# EAGLE board untitled (EAGLE 4.11)
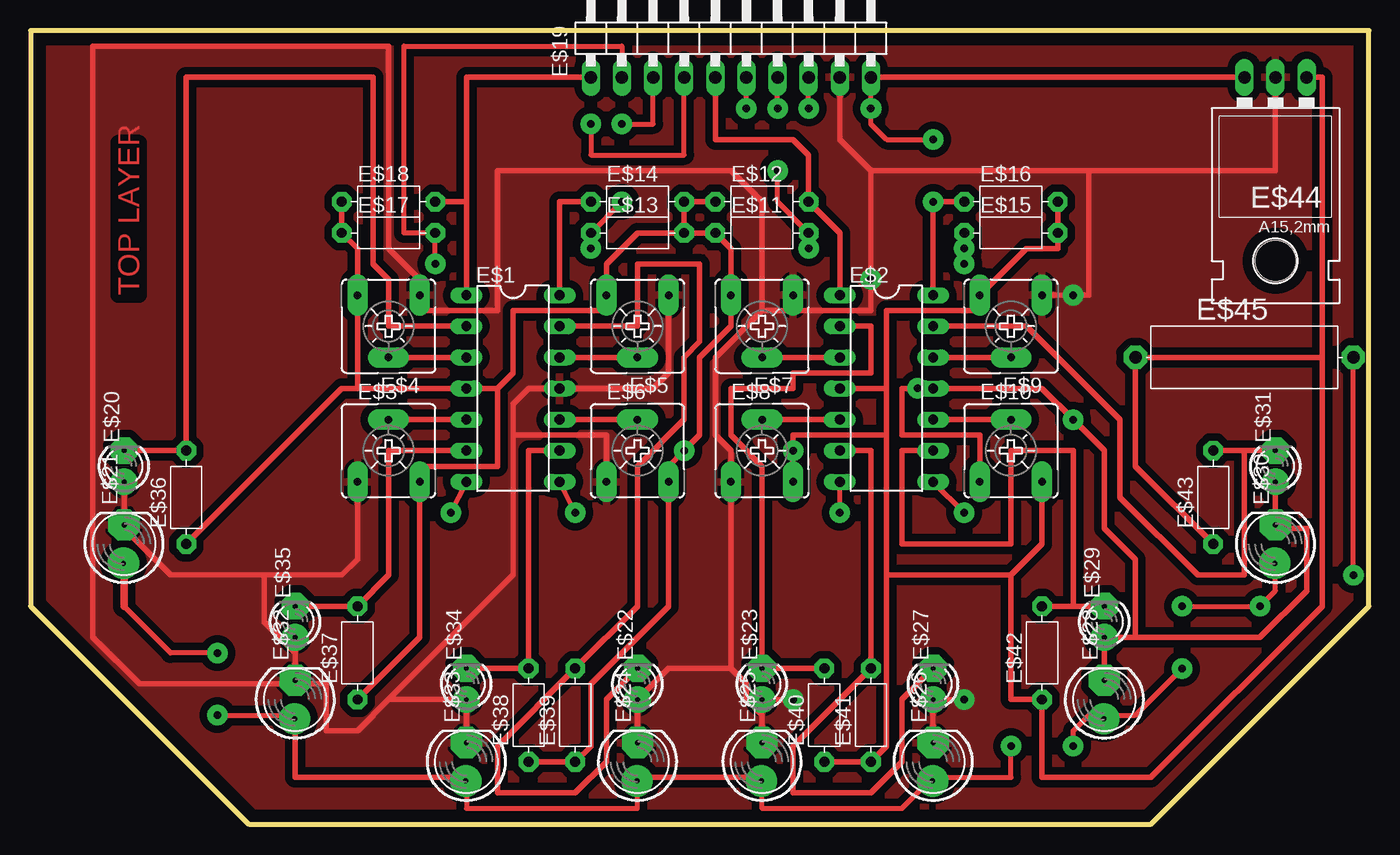
[diagram p0: board, top side]
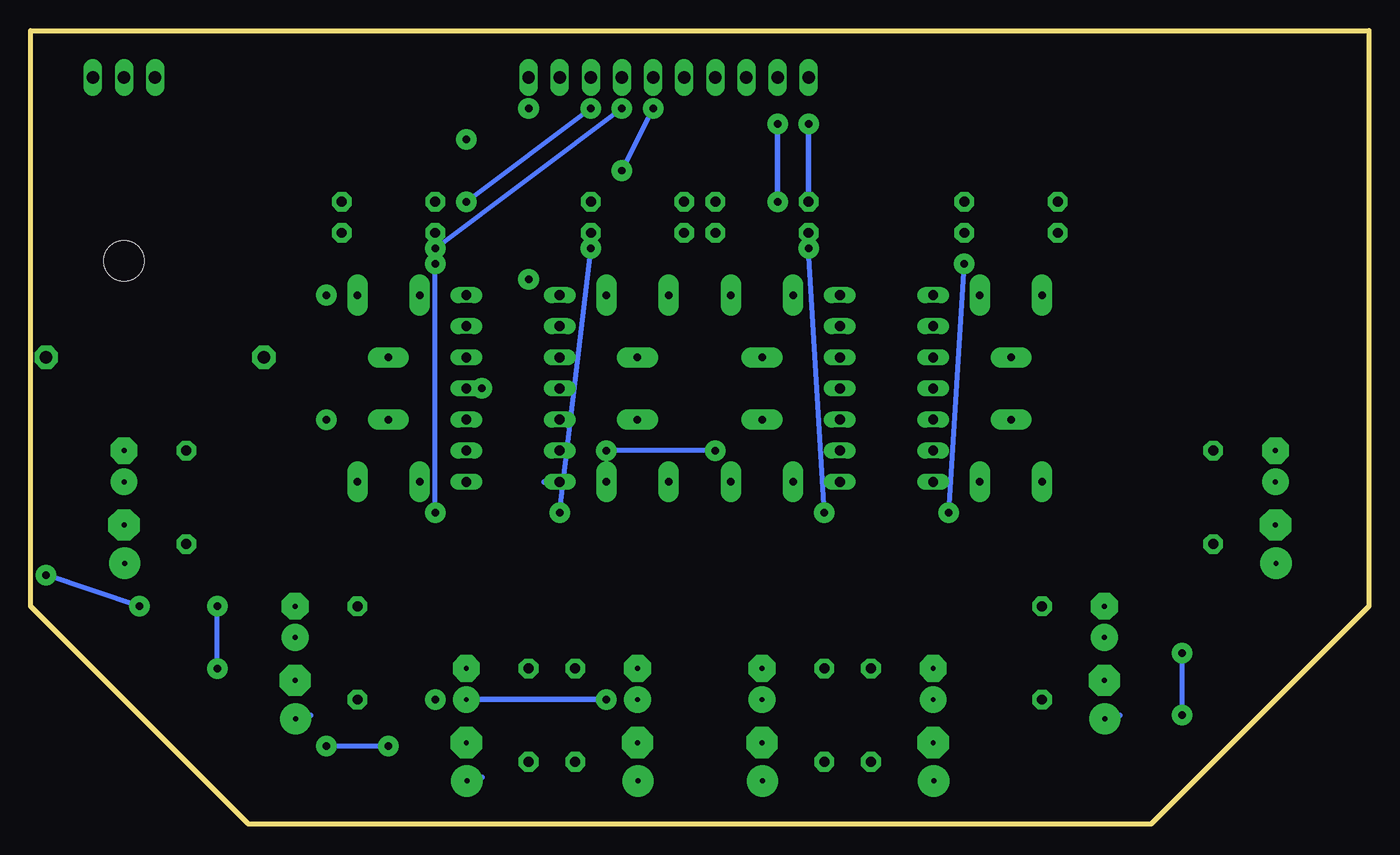
[diagram p1: board, bottom side, seen from below]

Size 109.22 x 64.77 mm. Coordinates in mm from the lower left corner, seen from the top.
Outline: 17.78,0 91.44,0 109.22,17.78 109.22,64.77 0,64.77 0,17.78 17.78,0
Copper layers (1*16): Top 0.035mm / dielectric 1.5mm / Bottom 0.035mm
Design rules "default": minimum track width 18mil, minimum drill 24mil, track to track 15mil, track to pad 15mil, pad to pad 15mil, via to via 15mil, smd to smd 8mil, copper to edge 40mil, drill to drill 8mil, minimum pad ring 10mil, minimum via ring 8mil, stop-mask expansion 4mil, vias tented up to drill 0mil, thermal gap 10mil

## Footprints (pad centres in the part's own frame; a part is rotated, then mirrored left to right if it is on the bottom)
DIL14 = drill 0.813 long: 1 -7.62,-3.81; 2 -5.08,-3.81; 3 -2.54,-3.81; 4 0,-3.81; 5 2.54,-3.81; 6 5.08,-3.81; 7 7.62,-3.81; 8 7.62,3.81; 9 5.08,3.81; 10 2.54,3.81; 11 0,3.81; 12 -2.54,3.81; 13 -5.08,3.81; 14 -7.62,3.81
CA6V = drill 0.61 pad 1.676 long: A -2.54,-2.54; E 2.54,-2.54; S 0,2.54
R-7,5 = drill 0.813 pad 1.6 octagon: 1 -3.81,0; 2 3.81,0
1X10/90 = drill 1.016 long: 1 -11.43,-3.81; 2 -8.89,-3.81; 3 -6.35,-3.81; 4 -3.81,-3.81; 5 -1.27,-3.81; 6 1.27,-3.81; 7 3.81,-3.81; 8 6.35,-3.81; 9 8.89,-3.81; 10 11.43,-3.81
LED3MM = drill 0.406 pad 2.184 round: A -1.27,0 | drill 0.406 pad 2.184 octagon: K 1.27,0
LED5MM = drill 0.406 pad 2.54 round: A -1.568,0.044 | drill 0.406 pad 2.54 octagon: K 1.568,0
78XXL = drill 1.016 long: GND 0,-3.81; IN -2.54,-3.81; OUT 2.54,-3.81 | hole 3.302: 0,11.176
R-18 = drill 1.016 pad 1.905 octagon: 1 -8.89,0; 2 8.89,0

## Placement (x,y rotation side)
E$1  [DIL14]  39.37,35.56 270 top
E$2  [DIL14]  69.85,35.56 270 top
E$3  [CA6V]  29.21,30.48 0 top
E$4  [CA6V]  29.21,40.64 180 top
E$5  [CA6V]  49.53,40.64 180 top
E$6  [CA6V]  49.53,30.48 0 top
E$7  [CA6V]  59.69,40.64 180 top
E$8  [CA6V]  59.69,30.48 0 top
E$9  [CA6V]  80.01,40.64 180 top
E$10  [CA6V]  80.01,30.48 0 top
E$11  [R-7,5]  59.69,48.26 0 top
E$12  [R-7,5]  59.69,50.8 0 top
E$13  [R-7,5]  49.53,48.26 0 top
E$14  [R-7,5]  49.53,50.8 0 top
E$15  [R-7,5]  80.01,48.26 0 top
E$16  [R-7,5]  80.01,50.8 0 top
E$17  [R-7,5]  29.21,48.26 0 top
E$18  [R-7,5]  29.21,50.8 0 top
E$19  [1X10/90]  57.15,64.77 0 top
E$20  [LED3MM]  7.62,29.21 90 top
E$21  [LED5MM]  7.62,22.86 90 top
E$22  [LED3MM]  49.53,11.43 90 top
E$23  [LED3MM]  59.69,11.43 90 top
E$24  [LED5MM]  49.53,5.08 90 top
E$25  [LED5MM]  59.69,5.08 90 top
E$26  [LED5MM]  73.66,5.08 90 top
E$27  [LED3MM]  73.66,11.43 90 top
E$28  [LED5MM]  87.63,10.16 90 top
E$29  [LED3MM]  87.63,16.51 90 top
E$30  [LED5MM]  101.6,22.86 90 top
E$31  [LED3MM]  101.6,29.21 90 top
E$32  [LED5MM]  21.59,10.16 90 top
E$33  [LED5MM]  35.56,5.08 90 top
E$34  [LED3MM]  35.56,11.43 90 top
E$35  [LED3MM]  21.59,16.51 90 top
E$36  [R-7,5]  12.7,26.67 90 top
E$37  [R-7,5]  26.67,13.97 90 top
E$38  [R-7,5]  40.64,8.89 90 top
E$39  [R-7,5]  44.45,8.89 90 top
E$40  [R-7,5]  64.77,8.89 90 top
E$41  [R-7,5]  68.58,8.89 90 top
E$42  [R-7,5]  82.55,13.97 90 top
E$43  [R-7,5]  96.52,26.67 90 top
E$44  [78XXL]  101.6,57.15 180 top
E$45  [R-18]  99.06,38.1 0 top

## Library data of the parts
E$1 E$2 = ic-package
E$3-E$10 = pot
E$11-E$18 E$36-E$43 E$45 = discrete
E$19 = pinhead
E$20-E$35 = led
E$44 = v-reg

## Nets
S$1: E$1.2 E$20.K E$36.2
S$2: E$2.6 E$27.K E$41.2
S$3: E$1.8 E$13.1 E$19.3
S$4: E$2.7 E$11.2 E$19.6
S$5: E$1.9 E$34.K E$38.2
S$6: E$1.3 E$4.S
S$7: E$1.5 E$3.S
S$8: E$1.6 E$35.K E$37.2
S$9: E$2.11 E$10.A E$28.K E$29.A E$30.K E$31.A
S$10: E$1.14 E$14.1 E$19.4
S$11: E$1.12 E$5.S
S$12: E$1.10 E$6.S
S$13: E$1.13 E$22.K E$39.2
S$14: E$24.A E$25.A E$32.A E$33.A
S$15: E$19.10 E$44.OUT
S$16: E$2.2 E$23.K E$40.2
S$18: E$2.3 E$7.S
S$19: E$2.8 E$15.1 E$19.7
S$20: E$45.2
S$21: E$2.12 E$9.S
S$22: E$2.10 E$10.S
S$23: E$2.9 E$29.K E$42.2
S$24: E$2.13 E$31.K E$43.2
S$25: E$26.A
S$26: E$28.A
S$29: E$1.4 E$2.4 E$3.E E$4.E E$5.E E$6.E E$7.E E$8.E E$9.E E$10.E E$11.1 E$12.1 E$13.2 E$14.2 E$15.2 E$16.2 E$17.1 E$18.1 E$36.1 E$37.1 E$38.1 E$39.1 E$40.1 E$41.1 E$42.1 E$43.1 E$44.IN E$45.1
S$32: E$2.14 E$16.1 E$19.8
S$35: E$1.1 E$18.2 E$19.1
S$40: E$1.11 E$3.A E$4.A E$5.A E$6.A E$7.A E$8.A E$9.A E$19.9 E$20.A E$21.K E$22.A E$23.A E$24.K E$25.K E$26.K E$27.A E$32.K E$33.K E$34.A E$35.A E$44.GND
S$44: E$2.1 E$12.2 E$19.5
S$46: E$2.5 E$8.S
S$56: E$1.7 E$17.2 E$19.2

## Tracks (layer width: path | path; a pad name or v marks a point on that pad's centre or on a via)
S$1
  Top 0.457: E$1.2 29.21,40.64 29.21,44.45 27.94,45.72 27.94,60.96 12.7,60.96 E$36.2 E$20.K
S$2
  Top 0.457: E$2.6 68.58,30.48 E$41.2 62.23,6.35 62.23,2.54 68.58,2.54 71.12,5.08 71.12,10.16 E$27.K
S$3  (via drill 0.61 pad 1.68)
  Top 0.406: v44.45,25.4 E$1.8 | E$19.3 50.8,57.15 v48.26,57.15 | v48.26,50.8 E$13.1 v45.72,46.99
  Bottom 0.406: v44.45,25.4 v45.72,46.99
  Bottom 0.457: v48.26,50.8 v48.26,57.15
S$4  (via drill 0.61 pad 1.68)
  Top 0.406: v66.04,25.4 E$2.7 | v60.96,53.34 60.96,50.8 E$11.2 v63.5,46.99 | v58.42,58.42 E$19.6 v58.42,58.42
  Bottom 0.406: v66.04,25.4 v63.5,46.99 | v60.96,53.34 v58.42,58.42
  Bottom 0.457: E$2.7 67.31,27.94
S$5
  Top 0.457: E$1.9 40.64,30.48 E$38.2 E$34.K
S$6
  Top 0.457: E$4.S E$1.3
S$7
  Top 0.457: E$3.S E$1.5
S$8
  Top 0.457: E$1.6 29.21,30.48 29.21,20.32 E$37.2 E$35.K
S$9  (via drill 0.61 pad 1.68)
  Top 0.457: E$10.A 77.47,31.75 71.12,31.75 71.12,35.56 v72.39,35.56 E$2.11 82.55,35.56 v85.09,33.02 87.63,30.48 87.63,24.13 90.17,21.59 90.17,15.24 | E$31.A E$30.K 101.6,24.13 104.14,24.13 104.14,19.05 100.33,15.24 90.17,15.24 | 90.17,15.24 E$29.A E$28.K
S$10  (via drill 0.61 pad 1.68)
  Top 0.406: v45.72,57.15 45.72,54.61 53.34,54.61 E$19.4
  Top 0.457: E$1.14 43.18,50.8 E$14.1
  Bottom 0.457: E$14.1 v45.72,57.15
S$11
  Top 0.457: E$1.12 E$5.S
S$12
  Top 0.457: E$1.10 E$6.S
S$13
  Top 0.457: E$1.13 49.53,40.64 49.53,45.72 54.61,45.72 54.61,39.37 53.34,38.1 53.34,33.02 49.53,29.21 49.53,17.78 E$39.2 38.1,6.35 38.1,2.54 44.45,2.54 46.99,5.08 46.99,10.16 E$22.K
S$14
  Top 0.406: 49.53,3.81 49.53,1.27 35.56,1.27 35.56,2.54 35.56,3.81
  Top 0.457: E$25.A 58.42,3.81 49.53,3.81 E$24.A | 35.56,2.54 E$33.A 34.29,3.81 21.59,3.81 21.59,7.62 E$32.A
  Bottom 0.457: E$25.A 59.69,2.54 | E$32.A 20.32,8.89
S$15  (via drill 0.61 pad 1.68)
  Top 0.406: E$19.10 v68.58,58.42 68.58,57.15 69.85,55.88 v73.66,55.88
  Top 0.457: E$19.10 E$44.OUT
S$16
  Top 0.457: E$2.2 68.58,40.64 68.58,36.83 62.23,36.83 62.23,35.56 57.15,35.56 57.15,31.75 59.69,29.21 E$23.K E$40.2
S$18
  Top 0.457: E$7.S E$2.3
S$19  (via drill 0.61 pad 1.68)
  Top 0.406: E$2.8 v76.2,25.4 | v60.96,58.42 E$19.7 | E$15.1 v76.2,46.99 v76.2,45.72
  Bottom 0.406: v76.2,25.4 v76.2,45.72 | v76.2,46.99 v60.96,58.42
S$20  (via drill 0.61 pad 1.68)
  Top 0.406: 101.6,21.59 101.6,19.05 v100.33,17.78 v93.98,17.78 | v107.95,20.32 E$45.2 | v93.98,12.7 90.17,8.89 86.36,8.89 85.09,7.62 v85.09,6.35 | v80.01,6.35 80.01,3.81 73.66,3.81 71.12,1.27 59.69,1.27 59.69,3.81
  Bottom 0.406: v93.98,12.7 v93.98,17.78 | v80.01,6.35 v85.09,6.35 | v100.33,17.78 v107.95,20.32 v100.33,17.78
S$21
  Top 0.457: E$2.12 E$9.S
S$22
  Top 0.457: E$2.10 E$10.S
S$23
  Top 0.457: 85.09,17.78 85.09,30.48 80.01,30.48 80.01,22.86 71.12,22.86 71.12,30.48 E$2.9 | 85.09,17.78 E$42.2 | 85.09,17.78 E$29.K
S$24
  Top 0.457: 99.06,30.48 99.06,20.32 95.25,20.32 88.9,26.67 88.9,33.02 81.28,40.64 E$2.13 | 99.06,30.48 E$43.2 | 99.06,30.48 E$31.K
S$25
  Bottom 0.457: 72.39,3.81 E$26.A 73.66,3.81
S$26
  Bottom 0.457: E$28.A 86.36,8.89
S$29  (via drill 0.61 pad 1.68)
  Top 0.457: E$13.2 E$14.2 | E$13.2 E$11.1 57.15,46.99 E$7.E 57.15,40.64 54.61,38.1 54.61,31.75 v53.34,30.48 52.07,29.21 E$6.E 52.07,17.78 45.72,11.43 45.72,6.35 E$39.1 E$38.1 | E$14.2 E$12.1 | E$13.2 49.53,48.26 46.99,45.72 E$5.E 46.99,41.91 39.37,41.91 39.37,36.83 38.1,35.56 | E$13.2 E$14.2 | E$37.1 31.75,15.24 E$3.E 31.75,29.21 38.1,29.21 38.1,35.56 | E$18.1 E$17.1 26.67,46.99 E$4.E 26.67,35.56 | 26.67,35.56 E$1.4 38.1,35.56 | E$36.1 25.4,35.56 26.67,35.56 | 105.41,38.1 E$45.1 90.17,29.21 E$43.1 | 105.41,38.1 105.41,60.96 E$44.IN | E$15.2 E$16.2 E$15.2 | E$15.2 83.82,46.99 81.28,46.99 E$9.E 77.47,41.91 69.85,41.91 69.85,35.56 | 69.85,31.75 62.23,31.75 v62.23,30.48 E$8.E | 69.85,35.56 E$2.4 | E$40.1 E$41.1 69.85,6.35 69.85,20.32 | 80.01,20.32 80.01,10.16 E$42.1 82.55,3.81 91.44,3.81 105.41,17.78 105.41,38.1 | 80.01,20.32 82.55,22.86 E$10.E | 69.85,20.32 80.01,20.32 | 69.85,31.75 69.85,20.32 | 69.85,31.75 69.85,35.56
  Bottom 0.406: v53.34,30.48 v62.23,30.48
  Bottom 0.457: E$8.E 62.23,26.67
S$32  (via drill 0.61 pad 1.68)
  Top 0.406: v63.5,58.42 E$19.8
  Top 0.457: E$2.14 v73.66,50.8 E$16.1
  Bottom 0.406: v73.66,50.8 v63.5,58.42
S$35
  Top 0.457: E$1.1 35.56,50.8 | 35.56,50.8 E$18.2 | 35.56,50.8 35.56,60.96 E$19.1
S$40  (via drill 0.61 pad 1.68)
  Top 0.406: E$27.A v76.2,10.16 | E$23.A v62.23,10.16
  Top 0.457: E$27.A E$26.K | 59.69,8.89 E$25.K | 59.69,8.89 E$23.A | 59.69,8.89 58.42,10.16 58.42,11.43 57.15,12.7 | E$24.K E$22.A 52.07,12.7 57.15,12.7 | E$9.A v85.09,43.18 86.36,43.18 86.36,53.34 | E$44.GND 101.6,53.34 86.36,53.34 | E$19.9 66.04,55.88 68.58,53.34 | 68.58,53.34 86.36,53.34 | 57.15,12.7 E$8.A 57.15,30.48 55.88,31.75 55.88,38.1 59.69,41.91 | E$5.A 52.07,36.83 50.8,35.56 E$1.11 40.64,35.56 39.37,34.29 39.37,31.75 | 68.58,53.34 v68.58,44.45 68.58,41.91 62.23,41.91 | 62.23,41.91 E$7.A | 59.69,41.91 62.23,41.91 | 7.62,25.4 E$20.A | 7.62,25.4 E$21.K | E$6.A 46.99,31.75 39.37,31.75 | E$3.A 26.67,21.59 25.4,20.32 19.05,20.32 | 7.62,25.4 7.62,24.13 11.43,20.32 19.05,20.32 | 59.69,41.91 59.69,50.8 57.15,53.34 38.1,53.34 38.1,41.91 31.75,41.91 | 39.37,31.75 39.37,20.32 29.21,10.16 | E$33.K E$34.A 29.21,10.16 | 19.05,20.32 19.05,16.51 21.59,13.97 | 29.21,10.16 26.67,7.62 24.13,7.62 24.13,11.43 21.59,11.43 | 21.59,13.97 E$35.A | 31.75,41.91 E$4.A | 31.75,41.91 31.75,44.45 29.21,46.99 29.21,63.5 5.08,63.5 5.08,15.24 8.89,11.43 21.59,11.43 | 21.59,13.97 E$32.K 21.59,11.43
  Bottom 0.457: v62.23,10.16 E$27.A
  pour Top (isolate 0.61): 0,64.77 86.36,64.77 109.22,64.77 109.22,17.78 91.44,0 17.78,0 0,17.78
S$44
  Top 0.457: E$2.1 66.04,48.26 E$12.2 63.5,54.61 62.23,55.88 55.88,55.88 E$19.5
S$46
  Top 0.457: E$8.S E$2.5
S$53  (via drill 0.61 pad 1.68)
  Top 0.406: v15.24,8.89 21.59,8.89 | 7.62,20.32 7.62,17.78 11.43,13.97 v15.24,13.97
  Top 0.61: 7.62,21.59 7.62,20.32 7.62,17.78
  Bottom 0.406: v15.24,8.89 v15.24,13.97
S$56  (via drill 0.61 pad 1.68)
  Top 0.406: E$19.2 48.26,63.5 30.48,63.5 30.48,48.26 E$17.2 v33.02,45.72 | v34.29,25.4 E$1.7
  Bottom 0.406: v34.29,25.4 v33.02,45.72

## Text on the board
Top: TOP LAYER